# EAGLE board BATT_CPU_TEST_BED (EAGLE 9.6.2)
REV: C
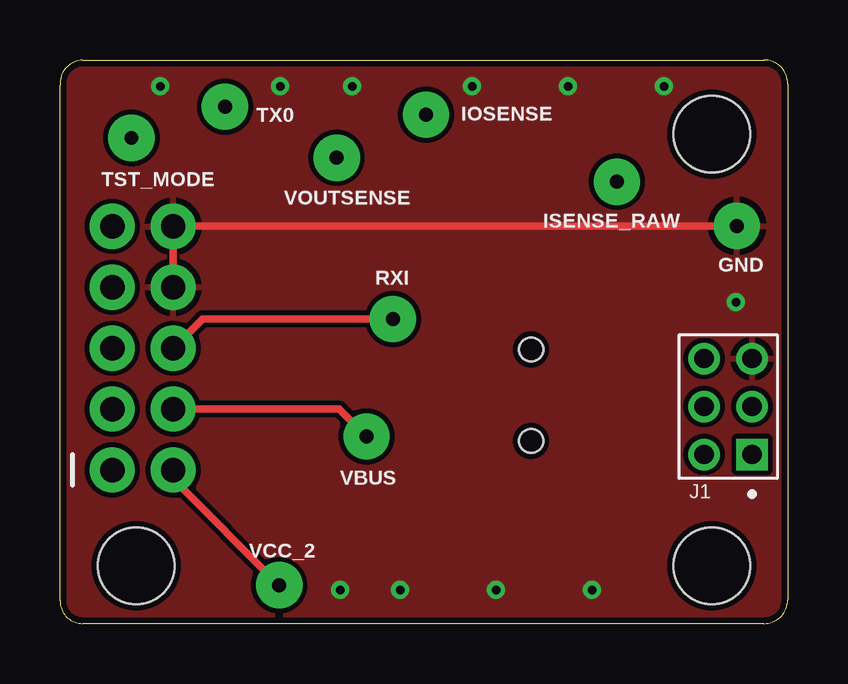
[diagram p0: board, top side]
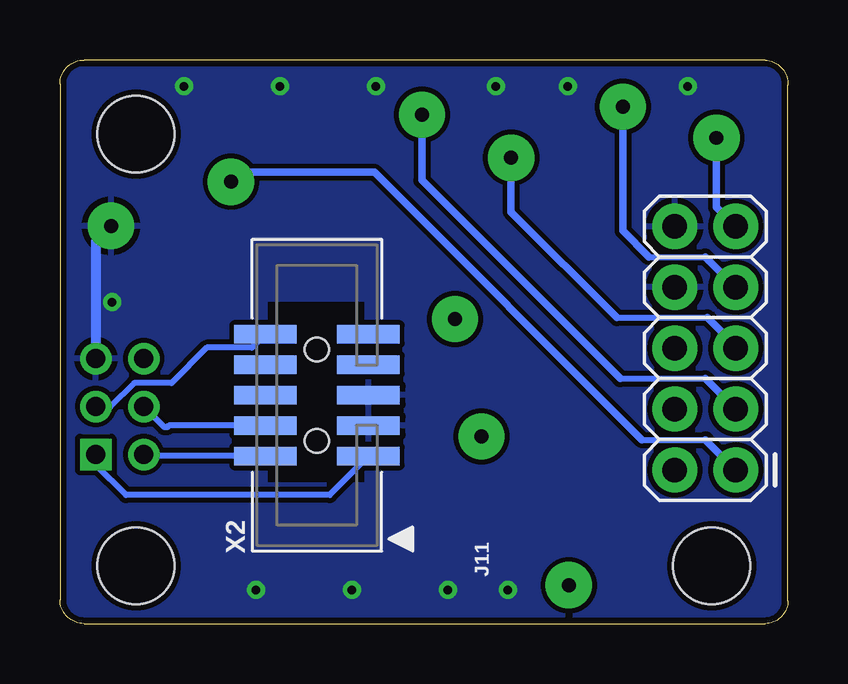
[diagram p1: board, bottom side, seen from below]

Size 30.35 x 23.5 mm. Coordinates in mm from the lower left corner, seen from the top.
Outline: 0.95,23.5 29.35,23.5 arc-90 30.35,22.5 30.35,1 arc-90 29.35,0 0.95,0 arc-90 0,0.95 0,22.45 arc-90 0.95,23.5
Copper layers (1+2*15+16): Top 0.035mm / dielectric 1.5mm / Route2 0.035mm / dielectric 0.15mm / Route15 0.035mm / dielectric 0.2mm / Bottom 0.035mm
Design rules "adafruit *": minimum track width 8mil, minimum drill 8mil, track to track 8mil, track to pad 8mil, pad to pad 8mil, via to via 8mil, smd to smd 8mil, copper to edge 10mil, drill to drill 8mil, minimum pad ring 10mil, minimum via ring 8mil, stop-mask expansion 2mil, vias tented up to drill 20mil, thermal gap 10mil
Net classes: 2 gnd: width 0.305 mm, drill 0.483 mm, clearance 0.203 mm
Holes 3.2 mm at 3.18,2.4 27.18,2.4 27.18,20.4
bRestrict: area 17.7,5.9 to 21.7,13.4

## Footprints (pad centres in the part's own frame; a part is rotated, then mirrored left to right if it is on the bottom)
1X01_POGOPIN_HOLE_0.061_DIA = drill 0.58 pad 1.93: 2 0,0
TE_2314820-6 = drill 0.8 pad 1.15 square: 1 0,0 | drill 0.8 pad 1.15: 2 0,2; 3 2,0; 4 2,2; 5 4,0; 6 4,2
2X5 = drill 1.016 pad 1.88: 1 0,0; 2 0,2.54; 3 2.54,0; 4 2.54,2.54; 5 5.08,0; 6 5.08,2.54; 7 7.62,0; 8 7.62,2.54; 9 10.16,0; 10 10.16,2.54
2X05_1.27MM_BOX_POSTS = smd 0.76 x 2.6: 1 -2.54,-2.15; 2 -2.54,2.15; 3 -1.27,-2.15; 4 -1.27,2.15; 5 0,-2.15; 6 0,2.15; 7 1.27,-2.15; 8 1.27,2.15; 9 2.54,-2.15; 10 2.54,2.15 | hole 1: -1.905,0; 1.905,0

## Placement (x,y rotation side)
GND  [1X01_POGOPIN_HOLE_0.061_DIA]  28.22,16.58 0 top
IOSENSE  [1X01_POGOPIN_HOLE_0.061_DIA]  15.26,21.22 0 top
ISENSE_RAW  [1X01_POGOPIN_HOLE_0.061_DIA]  23.22,18.42 0 top
J1  2314820-6  [TE_2314820-6]  28.85,7.05 90 top
J11  [2X5]  2.18,6.4 90 bottom
RXI  [1X01_POGOPIN_HOLE_0.061_DIA]  13.88,12.7 0 top
TST_MODE  [1X01_POGOPIN_HOLE_0.061_DIA]  2.98,20.25 0 top
TX0  [1X01_POGOPIN_HOLE_0.061_DIA]  6.88,21.55 0 top
VBUS  [1X01_POGOPIN_HOLE_0.061_DIA]  12.78,7.8 0 top
VCC_2  [1X01_POGOPIN_HOLE_0.061_DIA]  9.14,1.6 0 top
VOUTSENSE  [1X01_POGOPIN_HOLE_0.061_DIA]  11.54,19.42 0 top
X2  2x5 0.05" SWD  [2X05_1.27MM_BOX_POSTS]  19.64,9.52 90 bottom

## Library data of the parts
GND IOSENSE ISENSE_RAW RXI TST_MODE TX0 VBUS VCC_2 VOUTSENSE = SparkFun-Connectors
J1 = connector 2x3-2mm; COMMENT: 2314820-6; DESCRIPTION: Socket Receptacle 6P,2MM,B-B,REC,DRVT,2.7,0.1AU,TB 6 POS; DIGI-KEY_PART_NUMBER: 17-2314820-6-ND; MF: TE Connectivity; MP: 2314820-6; PACKAGE: None; PURCHASE-URL: https://pricing.snapeda.com/search/part/2314820-6/?ref=eda
J11 = SparkFun-Connectors; PROD_ID: CONN-08499; SF_ID: PRT-0778
X2 = microbuilder

## Nets
!RESET: J1.3 X2.10
GND: GND.2 J1.5 J11.8 J11.10 X2.3 X2.5
IOSENSE: IOSENSE.2 J11.3
ISENSE_RAW: ISENSE_RAW.2 J11.1
RXI: J11.6 RXI.2
SWCLK: J1.4 X2.4
SWDIO: J1.2 X2.2
TST_MODE: J11.9 TST_MODE.2
TXO: J11.7 TX0.2
VBUS: J11.4 VBUS.2
VCC: J1.1 X2.1
VCC_2: J11.2 VCC_2.2
VOUTSENSE: J11.5 VOUTSENSE.2

## Tracks (layer width: path | path; a pad name or v marks a point on that pad's centre or on a via)
!RESET
  Bottom 0.254: X2.10 22.35,11.5 24.23,11.5 25.7,10.03 27.26,10.03 28.25,9.05 J1.3
GND  (via drill 0.35)
  Top 0.254: J11.10 4.74,16.58
  Top 0.305: GND.2 4.74,16.58 | J11.8 J11.10
  Bottom 0.406: GND.2 28.85,15.95 J1.5
  other vias: 11.68,1.4 14.18,1.4 18.18,1.4 22.18,1.4 28.18,13.4 25.18,22.4 21.18,22.4 17.18,22.4 12.18,22.4 9.18,22.4 4.18,22.4
  pour Bottom: -0.82,23.9 31.18,23.9 31.18,-0.6 -0.82,-0.6
  pour Top: 0.18,23.4 30.68,23.4 30.68,-0.6 0.18,-0.6
IOSENSE
  Bottom 0.254: 6.99,10.21 3.45,10.21
  Bottom 0.305: IOSENSE.2 15.26,18.48 6.99,10.21 | 3.45,10.21 J11.3
ISENSE_RAW
  Bottom 0.254: 6.08,7.66 3.44,7.66
  Bottom 0.305: J11.1 3.44,7.66 | ISENSE_RAW.2 22.82,18.82 17.24,18.82 6.08,7.66
RXI
  Top 0.305: RXI.2 5.94,12.7 J11.6
SWCLK
  Bottom 0.254: X2.4 25.81,8.25 25.88,8.18 25.99,8.18 J1.4
SWDIO
  Bottom 0.254: X2.2 26.79,6.98 J1.2
TST_MODE
  Bottom 0.305: TST_MODE.2 2.98,17.36 J11.9
TXO
  Bottom 0.254: 5.79,15.29 3.45,15.29
  Bottom 0.305: TX0.2 6.88,16.38 5.79,15.29 | 3.45,15.29 J11.7
VBUS
  Top 0.305: VBUS.2 11.64,8.94 J11.4
VCC
  Bottom 0.254: X2.1 19.11,5.36 27.6,5.36 28.85,6.62 J1.1
VCC_2
  Top 0.254: 4.72,6.02 J11.2
  Top 0.305: VCC_2.2 4.72,6.02
VOUTSENSE
  Bottom 0.254: 7.13,12.75 3.37,12.75 | 2.18,11.56 J11.5
  Bottom 0.305: VOUTSENSE.2 11.54,17.16 7.13,12.75 | 3.37,12.75 2.18,11.56